# Altium PCB PCB1.PcbDoc
Units mil, origin at the board's own origin, x right, y up, seen from the top; angles counter-clockwise.
Board outline 6000 x 4000 mil, 2 copper layers (Top Layer, Bottom Layer); 17 components, 16 nets, 67 pads, 0 vias.
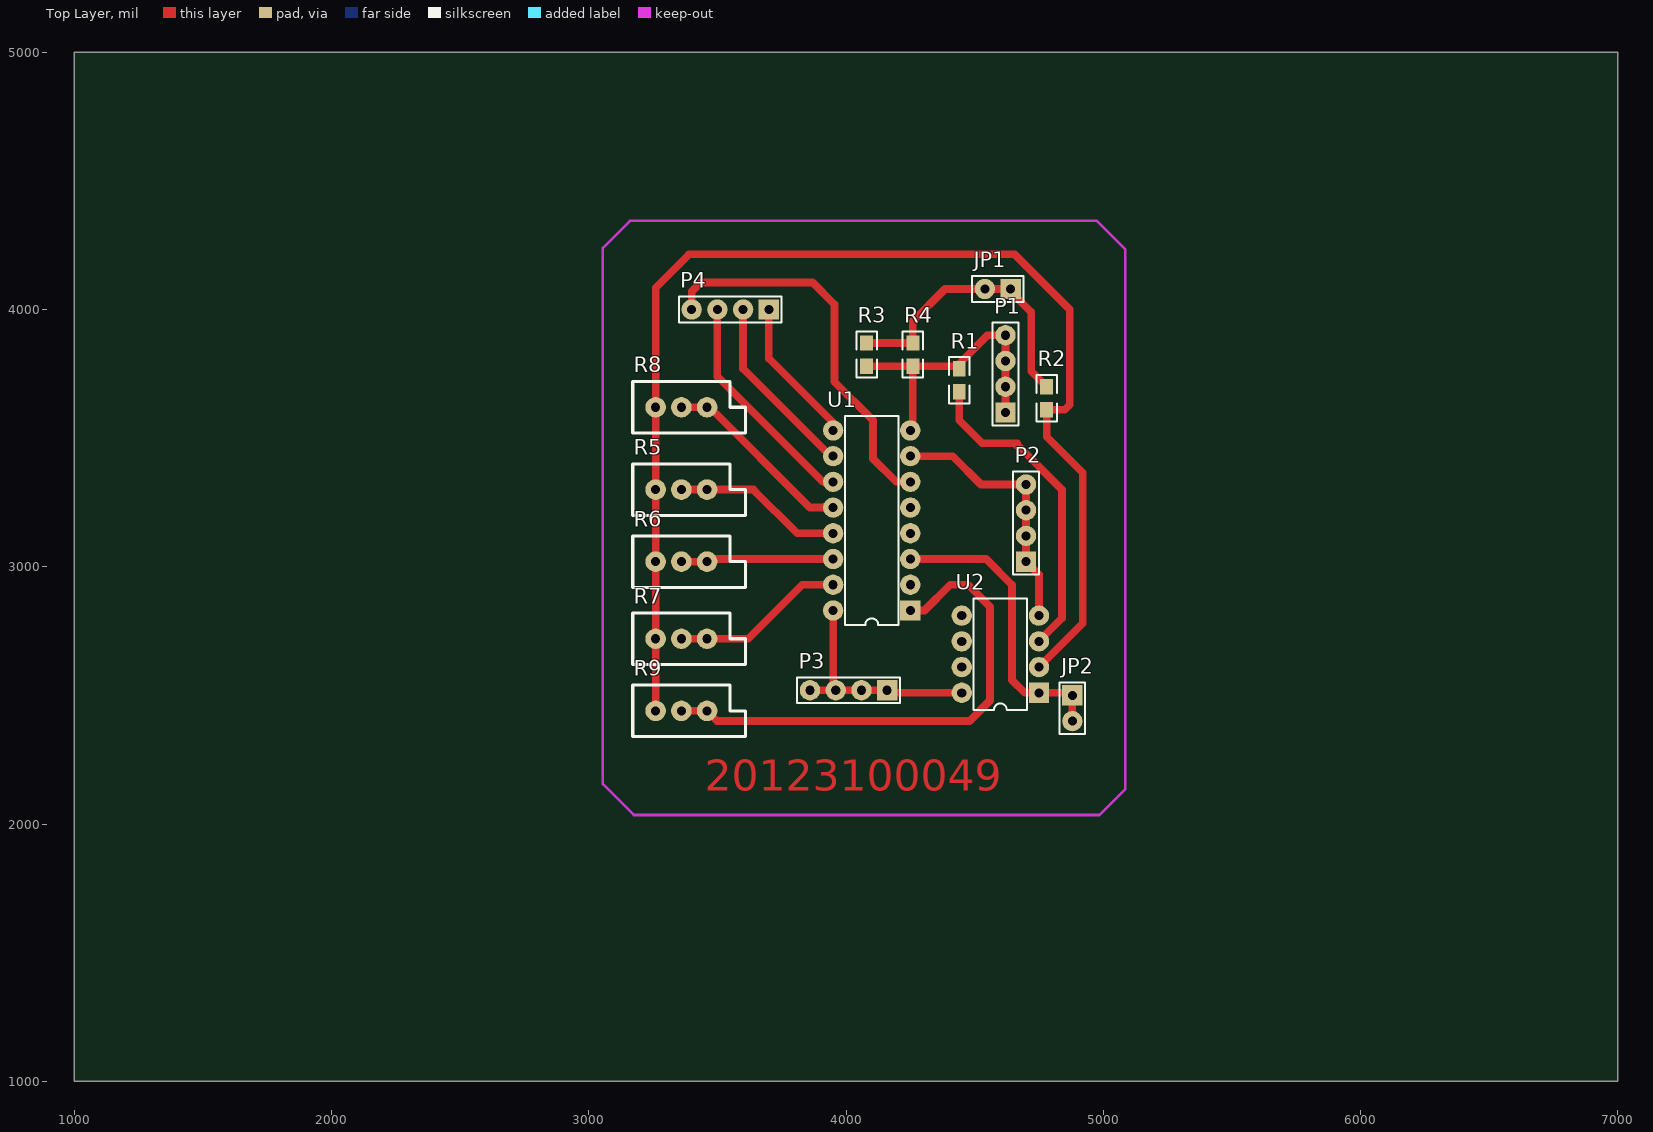
[diagram p0: Top Layer view]
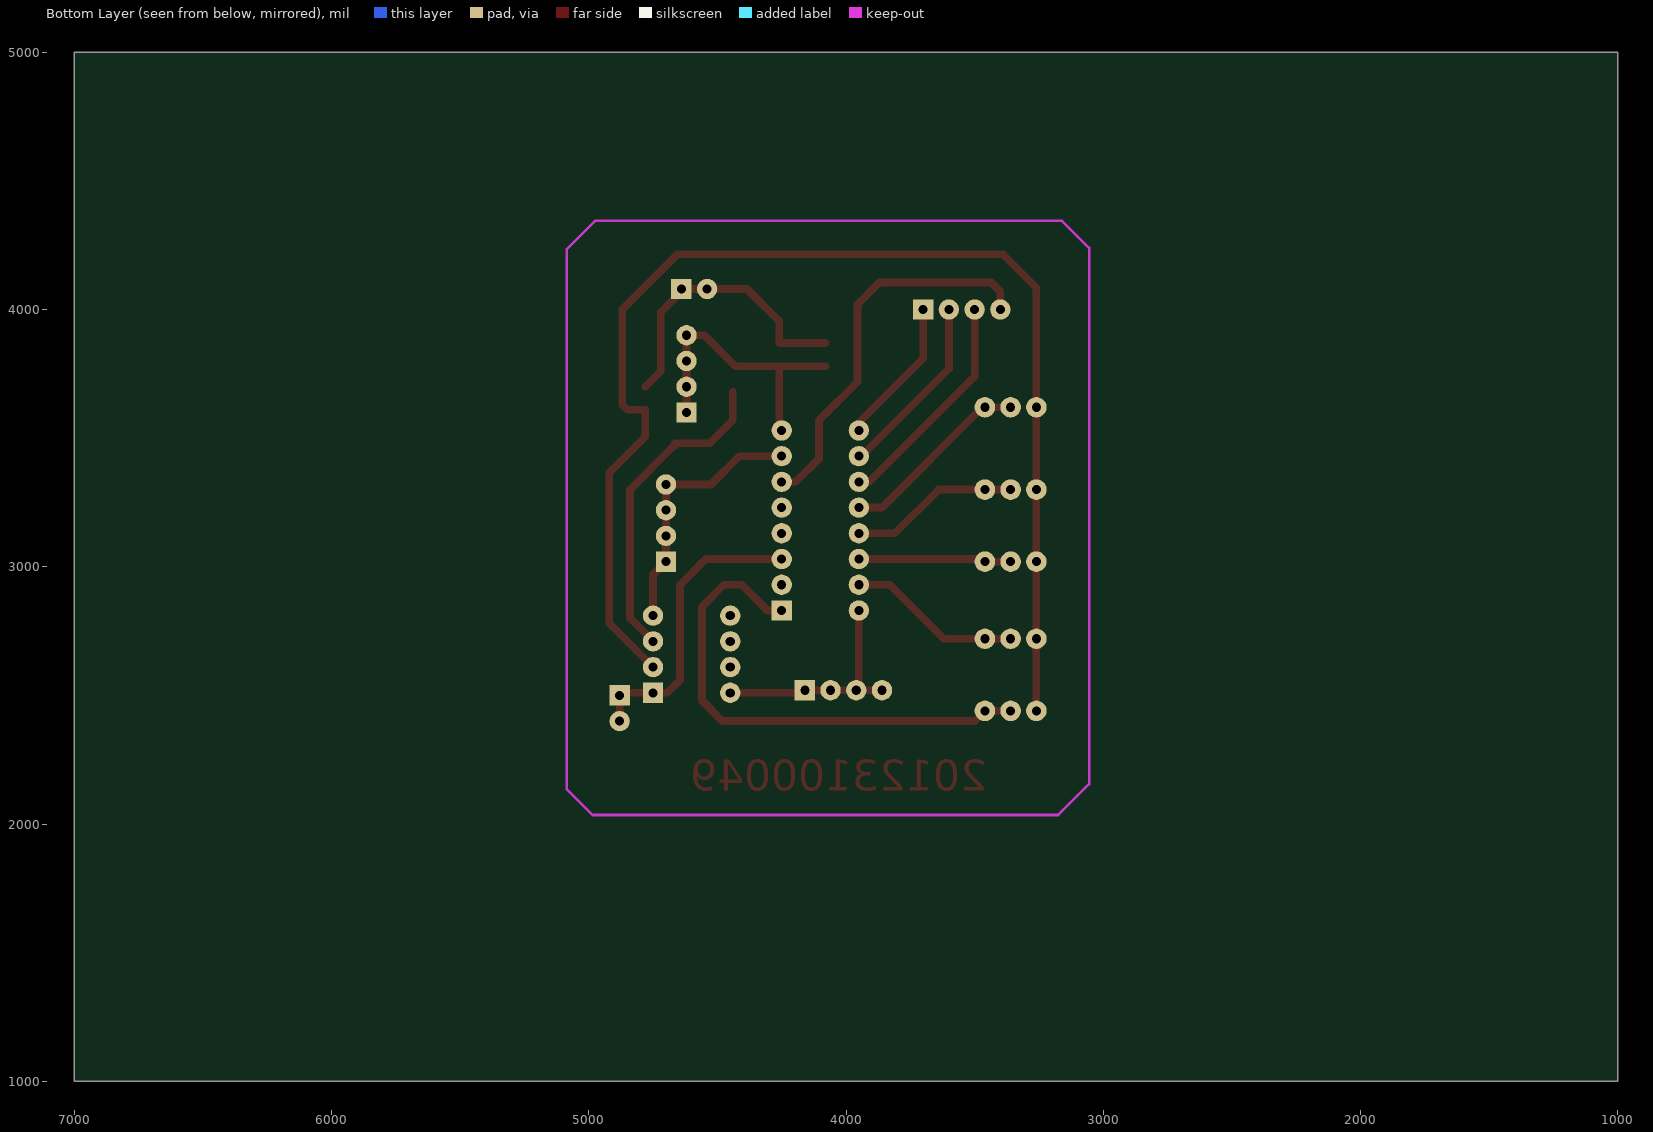
[diagram p1: Bottom Layer view, seen from below]

## Layer stack, top to bottom
Top Layer: signal copper 1.4
Dielectric: dielectric 12.6, FR-4, Dk 4.8
Bottom Layer: signal copper 1.4

## Board outline
1000,1000 7000,1000 7000,5000 1000,5000

## Design rules (kind name [scope] priority, off if disabled: settings)
Clearance [All] p1: gap=15
FabricationTestPointUsage TestPointUsage [All] p1: valid=0 allowmultiple=FALSE
FabricationTestpoint Testpoint [All] p1: side=3 testpointundercomponent=TRUE minsize=40 maxsize=100 preferedsize=60 minholesize=0 maxholesize=40 preferedholesize=32 testpointgrid=1 allowsidetop=TRUE allowsidebottom=TRUE usegrid=TRUE gridtolerance=0.01
PolygonConnect [All] p1: connectstyle=Relief reliefconductorwidth=10 reliefentries=4 polygonreliefangle="90 Angle" airgapwidth=10
RoutingVias [All] p1: holewidth=28 width=50 viastyle="Through Hole" minholewidth=28 minwidth=50 maxholewidth=28 maxwidth=50
SolderMaskExpansion [All] p1: expansion=4
Width [All] p1: maxlimit=40 minlimit=20 preferedwidth=30
26 further rules are at their usual default settings.

## Components (designator, comment, footprint, x,y, rotation, side; value= is the part's Value field where it differs from the comment)
JP1 "Header 2" HDR1X2 4640,4080 r180 top
JP2 "Header 2" HDR1X2 4880,2500 r270 top
P1 "Header 4" HDR1X4 4620,3600 r90 top
P2 "Header 4" HDR1X4 4700,3020 r90 top
P3 "Header 4" HDR1X4 4160,2520 r180 top
P4 "Header 4" HDR1X4 3700,4000 r180 top
R1 "Res2" 0805 4440,3680 r90 top
R2 "Res2" 0805 4780,3700 r270 top
R3 "Res2" 0805 4080,3780 r90 top
R4 "Res2" 0805 4260,3780 r90 top
R5 "50K" VR5 3360,3300 r0 top
R6 "20K" VR5 3360,3020 r0 top
R7 "5K" VR5 3360,2720 r0 top
R8 "1K" VR5 3360,3620 r0 top
R9 "200Ω" VR5 3360,2440 r0 top
U1 "CD4051BCJ" J16A 4100,3180 r90 top
U2 "NE5532P" P008 4600,2660 r90 top

## Footprints (in the part's own frame and the unit in brackets; to place one, negate y for a bottom-side part, rotate by r counter-clockwise, add the part's x,y. Pads: shape width x height; smd on the part's side, far side on the other; paste and mask are expansions set on the pad)
0805 [mil]
  rect 60x50 smd: 1(0,0) 2(90,0)
  silkscreen extent -45,-40 135,40
HDR1X2 [mm] "Connector; Header; 2 Position"
  rect 2.008x2.008 hole 0.9: 1(0,0)
  round 2.008 hole 0.9: 2(2.54,0)
  silkscreen extent -1.27,-1.27 3.81,1.27
HDR1X4 [mm] "Connector; Header; 4 Position"
  rect 2.008x2.008 hole 0.9: 1(0,0)
  round 2.008 hole 0.9: 2(2.54,0) 3(5.08,0) 4(7.62,0)
  silkscreen extent -1.27,-1.27 8.89,1.27
J16A [mm] "DIP; 16 Leads; Row Spacing 7.62 mm; Pitch 2.54 mm"
  rect 2.008x2.008 hole 0.9: 1(-8.89,-3.81)
  round 2.008 hole 0.9: 2(-6.35,-3.81) 3(-3.81,-3.81) 4(-1.27,-3.81) 5(1.27,-3.81) 6(3.81,-3.81) 7(6.35,-3.81) 8(8.89,-3.81) 9(8.89,3.81) 10(6.35,3.81) 11(3.81,3.81) 12(1.27,3.81) 13(-1.27,3.81) 14(-3.81,3.81) 15(-6.35,3.81) 16(-8.89,3.81)
  silkscreen extent -10.3,-2.65 10.3,2.65
P008 [mm] "DIP; 8 Leads; Row Spacing 7.62 mm; Pitch 2.54 mm"
  rect 2.008x2.008 hole 0.9: 1(-3.81,-3.81)
  round 2.008 hole 0.9: 2(-1.27,-3.81) 3(1.27,-3.81) 4(3.81,-3.81) 5(3.81,3.81) 6(1.27,3.81) 7(-1.27,3.81) 8(-3.81,3.81)
  silkscreen extent -5.5,-2.65 5.5,2.65
VR5 [mil]
  round 80 hole 35.43 mask+4: 1(-100,0) 2(0,0) 3(100,0)
  silkscreen extent -189,-100 250,100

## Part data
JP1 JP2: "Header, 2-Pin"
P1 P2 P3 P4: "Header, 4-Pin"
R1 R2 R3 R4: "Resistor"
R5 R6 R7 R8 R9: library part POT2, "Potentiometer"
U1: "8-Channel Analog Multiplexer/Demultiplexer"
U2: "Dual Low-Noise Operational Amplifier"

## Nets (pads, with @x,y where several pads share a name; then routed paths per layer and width w, separated by ;. In a path a pad name is that pad's centre, name@x,y a point inside that pad or via, vN(x,y) a via of type N, cw(c..) or ccw(c..) an arc to the next point about the centre after c; other vN are vias at no path point)
GND: P1.1 P1.2 P1.3 P1.4 R1.2 R3.1 R4.1 U1.8 | length 1143.8
  Top Layer w30: R3.1 4430,3780 4550,3900 P1.4 P1.2 P1.1 ; U1.8 4260,3540 R4.1
NetJP1_1: JP1.1 JP1.2 R2.1 R3.2 R4.2 | length 1134.8
  Top Layer w30: R3.2 R4.2 4260,3955 4385,4080 JP1.1 4640,4070 4720,3990 4720,3760 R2.1
NetJP2_1: JP2.1 JP2.2 U1.3 U2.1 | length 1166.3
  Top Layer w30: U1.3 4545,3030 4645,2930 4645,2560 4695,2510 4870,2510 JP2.1 JP2.2
NetP4_1: P4.1 U1.9 | length 573.6
  Top Layer w30: P4.1 3700,3810 3950,3560 U1.9
NetP4_2: P4.2 U1.10 | length 720.8
  Top Layer w30: P4.2 3600,3770 3940,3430 U1.10
NetP4_3: P4.3 U1.11 | length 879.8
  Top Layer w30: P4.3 3500,3740 3910,3330 U1.11
NetP4_4: P4.4 U1.6 | length 1519.1
  Top Layer w30: P4.4 3400,4070 3435,4105 3870,4105 3955,4020 3955,3720 4105,3570 4105,3420 4195,3330 U1.6
NetR1_1: R1.1 U2.3 | length 1254.5
  Top Layer w30: R1.1 4440,3570 4530,3480 4665,3480 4665,3470 4670,3470 4839.45,3300.55 4839.45,2799.45 U2.3
NetR2_2: R2.2 R5.1 R6.1 R7.1 R8.1 R9.1 U2.2 | length 4984.6
  Top Layer w30: R9.1 R7.1 R5.1 3260,4085 3390,4215 4655,4215 4870,4000 4870,3630 4850,3610 R2.2 4780,3505 4920,3365 ; U2.2 4920,2780 4920,3355
NetR5_2: R5.2 R5.3 U1.13 | length 660.4
  Top Layer w30: R5.2 3640,3300 3810,3130 U1.13
NetR6_2: R6.2 R6.3 U1.14 | length 594.1
  Top Layer w30: R6.2 R6.3 3470,3030 U1.14
NetR7_2: R7.2 R7.3 U1.15 | length 677
  Top Layer w30: R7.2 3620,2720 3830,2930 U1.15
NetR8_2: R8.2 R8.3 U1.12 | length 751.5
  Top Layer w30: R8.2 R8.3 3470,3620 3860,3230 U1.12
NetR9_2: R9.2 R9.3 U1.1 | length 2001.3
  Top Layer w30: R9.2 R9.3 3500,2400 4480,2400 4560,2480 4560,2845 4475,2930 4405,2930 4305,2830 U1.1
VCC+5: P3.1 P3.2 P3.3 P3.4 U1.16 U2.8 | length 928.3
  Top Layer w30: P3.4 P3.3 ; U1.16 3950,2530 P3.3 ; U2.8@4450,2490 U2.8 4170,2510 P3.1 P3.3
VEE-5: P2.1 P2.2 P2.3 P2.4 U1.7 U2.4 | length 1026.3
  Top Layer w30: U1.7 4415,3430 4525,3320 P2.4 P2.1 4750,2970 U2.4
pads on no net: U1.2 U1.4 U1.5 U2.5 U2.6 U2.7

## Keep-outs
Keep-Out Layer:
  lines w10: 3055,2155 3175,2035 4985,2035 5085,2135 5085,4235 4975,4345 3160,4345 3055,4240 3055,2155

## Other copper
Top Layer:
  text "20123100049" at 3450,2130 h120